# EAGLE board Electronics_Design_v1 v2 (EAGLE 9.7.0)

Size 160 x 134.29 mm. Coordinates in mm from the lower left corner, seen from the top.
Outline: 0,0 160,0 160,134.29 0,134.29 0,0
Copper layers (1*16): Top / Bottom
Stack-up Default Layer Stack: Top User Defined 0.035mm / Dielectric-1 User Defined 1.5mm / Bottom User Defined 0.035mm
Design rules "default": minimum track width 6mil, minimum drill 0.35mm, track to track 6mil, track to pad 6mil, pad to pad 6mil, via to via 6mil, smd to smd 6mil, copper to edge 40mil, drill to drill 6mil, minimum pad ring 10mil, minimum via ring 8mil, stop-mask expansion 4mil, vias tented up to drill 0mil, thermal gap 10mil

## Footprints (pad centres in the part's own frame; a part is rotated, then mirrored left to right if it is on the bottom)
CAPPRD500W60D1000H1250 = drill 0.85 pad 1.2: N 2.5,0 | drill 0.85 pad 1.2 square: P -2.5,0
CAPRD2261W240D5080H5555B = drill 2.6 pad 3.9: 1 -11.305,0; 2 11.305,0
FAIRCHILD_SEMICONDUCTOR_1N4728A_0 = drill 1.15 pad 1.65: 1 -4.5,0; 2 4.5,0
DO35-4 = drill 0.9 pad 1.422: A 5.08,0 | drill 0.9 pad 1.422 square: C -5.08,0
LCD_AOM12864A0-1.54WW-ANO = drill 1 square: 1 -7.62,17 | drill 1: 2 -5.08,17; 3 -2.54,17; 4 0,17; 5 2.54,17; 6 5.08,17; 7 7.62,17 | drill 2.2: P1 -18.7,16.5; P2 18.7,16.5; P3 -18.7,-16.5; P4 18.7,-16.5
CONV_R-78E5.0-1.0 = drill 1 square: 1 -2.54,-2.25 | drill 1: 2 0,-2.25; 3 2.54,-2.25
RESAD724W46L381D178B = drill 0.66 pad 1.26: 1 -3.62,0; 2 3.62,0
3310Y-001-104L-ND = drill 0.71: 1 -2.54,-2.54; 2 0,2.54; 3 2.54,-2.54
SOP65P640X120-14N = smd 1.56 x 0.41: 1 -2.88,1.95; 2 -2.88,1.3; 3 -2.88,0.65; 4 -2.88,0; 5 -2.88,-0.65; 6 -2.88,-1.3; 7 -2.88,-1.95; 8 2.88,-1.95; 9 2.88,-1.3; 10 2.88,-0.65; 11 2.88,0; 12 2.88,0.65; 13 2.88,1.3; 14 2.88,1.95
TI_NATIONAL_SEMICONDUCTOR_LM4040BIZ-5.0_0 = drill 0.75 pad 2 square: 1 0,-1.27 | drill 0.75 pad 2: 2 0,0; 3 0,1.27
CUI_ACZ11BR1E-20FD1-20C = drill 1.2: A -2.5,-7.5; B 2.5,-7.5; C 0,-7.5; S1 -2.5,7; S2 2.5,7 | drill 1.8 square: P1 -4.7,0; P2 4.7,0
N14 = drill 0.787 pad 1.295 square: 1 -7.62,15.24 | drill 0.787 pad 1.295: 2 -7.62,12.7; 3 -7.62,10.16; 4 -7.62,7.62; 5 -7.62,5.08; 6 -7.62,2.54; 7 -7.62,0; 8 0,0; 9 0,2.54; 10 0,5.08; 11 0,7.62; 12 0,10.16; 13 0,12.7; 14 0,15.24
RPI_PICO_TH = drill 1.1 pad 1.6 offset: 3V3 8.89,13.97; 3V3_EN 8.89,16.51; ADC_VREF 8.89,11.43; AGND 8.89,6.35; GND@1 -8.89,19.05; GND@2 -8.89,6.35; GND@3 -8.89,-6.35; GND@4 -8.89,-19.05; GND@5 0,-23.9; GND@6 8.89,-19.05; GND@7 8.89,-6.35; GND@8 8.89,19.05; GP0 -8.89,24.13; GP1 -8.89,21.59; GP2 -8.89,16.51; GP3 -8.89,13.97; GP4 -8.89,11.43; GP5 -8.89,8.89; GP6 -8.89,3.81; GP7 -8.89,1.27; GP8 -8.89,-1.27; GP9 -8.89,-3.81; GP10 -8.89,-8.89; GP11 -8.89,-11.43; GP12 -8.89,-13.97; GP13 -8.89,-16.51; GP14 -8.89,-21.59; GP15 -8.89,-24.13; GP16 8.89,-24.13; GP17 8.89,-21.59; GP18 8.89,-16.51; GP19 8.89,-13.97; GP20 8.89,-11.43; GP21 8.89,-8.89; GP22 8.89,-3.81; GP26_A0 8.89,1.27; GP27_A1 8.89,3.81; GP28_A2 8.89,8.89; RUN 8.89,-1.27; SWCLK -2.54,-23.9; SWDIO 2.54,-23.9; VBUS 8.89,24.13; VSYS 8.89,21.59

## Placement (x,y rotation side)
C1  2.2nF  [CAPPRD500W60D1000H1250]  -207.01,41.91 0 top  (outside the outline)
C3  10uF  [CAPRD2261W240D5080H5555B]  -143.51,63.5 0 top  (outside the outline)
C4  22uF  [CAPRD2261W240D5080H5555B]  -39.37,120.65 0 top  (outside the outline)
C5  2.2nF  [CAPRD2261W240D5080H5555B]  -91.44,120.65 0 top  (outside the outline)
D2  FAIRCHILD_SEMICONDUCTOR_1N4728AFAIRCHILD_SEMICONDUCTOR_1N4728A_0_0  [FAIRCHILD_SEMICONDUCTOR_1N4728A_0]  -125.73,271.78 0 top  (outside the outline)
D3  FAIRCHILD_SEMICONDUCTOR_1N4728AFAIRCHILD_SEMICONDUCTOR_1N4728A_0_0  [FAIRCHILD_SEMICONDUCTOR_1N4728A_0]  -138.43,271.78 0 top  (outside the outline)
D4  FAIRCHILD_SEMICONDUCTOR_1N4728AFAIRCHILD_SEMICONDUCTOR_1N4728A_0_0  [FAIRCHILD_SEMICONDUCTOR_1N4728A_0]  -151.13,271.78 0 top  (outside the outline)
D5  1N914.4  [DO35-4]  -165.1,274.32 0 top  (outside the outline)
DS1  OLED Display  [LCD_AOM12864A0-1.54WW-ANO]  -59.69,228.6 0 top  (outside the outline)
PS1  R-78E5.0-1.0  [CONV_R-78E5.0-1.0]  10.16,12.7 0 top
R1  560k  [RESAD724W46L381D178B]  -72.39,264.16 0 top  (outside the outline)
R2  10k  [3310Y-001-104L-ND]  -133.35,214.63 0 top  (outside the outline)
R3  100  [RESAD724W46L381D178B]  -81.28,264.16 0 top  (outside the outline)
R4  1.8k  [RESAD724W46L381D178B]  -90.17,264.16 0 top  (outside the outline)
R5  5.6k  [RESAD724W46L381D178B]  -99.06,264.16 0 top  (outside the outline)
R6  1.8k  [RESAD724W46L381D178B]  -107.95,264.16 0 top  (outside the outline)
R7  100k  [RESAD724W46L381D178B]  -116.84,264.16 0 top  (outside the outline)
R8  100k  [RESAD724W46L381D178B]  -125.73,264.16 0 top  (outside the outline)
R9  1.1M  [RESAD724W46L381D178B]  -134.62,264.16 0 top  (outside the outline)
R10  10k  [3310Y-001-104L-ND]  -143.51,214.63 0 top  (outside the outline)
R11  100  [RESAD724W46L381D178B]  -143.51,264.16 0 top  (outside the outline)
R12  1.8k  [RESAD724W46L381D178B]  -152.4,264.16 0 top  (outside the outline)
R13  5.6k  [RESAD724W46L381D178B]  -161.29,264.16 0 top  (outside the outline)
R14  1.8k  [RESAD724W46L381D178B]  -170.18,264.16 0 top  (outside the outline)
R15  100k  [RESAD724W46L381D178B]  -179.07,264.16 0 top  (outside the outline)
R16  100k  [RESAD724W46L381D178B]  -187.96,264.16 0 top  (outside the outline)
R17  1.1M  [RESAD724W46L381D178B]  -196.85,264.16 0 top  (outside the outline)
R19  100  [RESAD724W46L381D178B]  -17.78,274.32 0 top  (outside the outline)
R20  1.8k  [RESAD724W46L381D178B]  -26.67,274.32 0 top  (outside the outline)
R21  6.8k  [RESAD724W46L381D178B]  -35.56,274.32 0 top  (outside the outline)
R22  1.8k  [RESAD724W46L381D178B]  -44.45,274.32 0 top  (outside the outline)
R23  100k  [RESAD724W46L381D178B]  -53.34,274.32 0 top  (outside the outline)
R24  100k  [RESAD724W46L381D178B]  -62.23,274.32 0 top  (outside the outline)
R25  150  [RESAD724W46L381D178B]  -71.12,274.32 0 top  (outside the outline)
R26  200  [RESAD724W46L381D178B]  -80.01,274.32 0 top  (outside the outline)
R27  150  [RESAD724W46L381D178B]  -88.9,274.32 0 top  (outside the outline)
R28  200  [RESAD724W46L381D178B]  -97.79,274.32 0 top  (outside the outline)
R29  150  [RESAD724W46L381D178B]  -106.68,274.32 0 top  (outside the outline)
R30  200  [RESAD724W46L381D178B]  -115.57,274.32 0 top  (outside the outline)
R31  10k  [3310Y-001-104L-ND]  -153.67,214.63 0 top  (outside the outline)
U1  TL084  [SOP65P640X120-14N]  -176.53,210.82 0 top  (outside the outline)
U2  TL084  [SOP65P640X120-14N]  -185.42,210.82 0 top  (outside the outline)
U3  TL084  [SOP65P640X120-14N]  -194.31,210.82 0 top  (outside the outline)
U4  TL084  [SOP65P640X120-14N]  -17.78,265.43 0 top  (outside the outline)
U5  TL084  [SOP65P640X120-14N]  -26.67,265.43 0 top  (outside the outline)
U6  TL084  [SOP65P640X120-14N]  -35.56,265.43 0 top  (outside the outline)
U7  TL084  [SOP65P640X120-14N]  -44.45,265.43 0 top  (outside the outline)
U8  TI_NATIONAL_SEMICONDUCTOR_LM4040BIZ-5.0TI_NATIONAL_SEMICONDUCTOR_LM4040BIZ-5.0_0_0  [TI_NATIONAL_SEMICONDUCTOR_LM4040BIZ-5.0_0]  -52.07,264.16 0 top  (outside the outline)
U9  TI_NATIONAL_SEMICONDUCTOR_LM4040BIZ-5.0TI_NATIONAL_SEMICONDUCTOR_LM4040BIZ-5.0_0_0  [TI_NATIONAL_SEMICONDUCTOR_LM4040BIZ-5.0_0]  -58.42,264.16 0 top  (outside the outline)
U10  TI_NATIONAL_SEMICONDUCTOR_LM4040BIZ-5.0TI_NATIONAL_SEMICONDUCTOR_LM4040BIZ-5.0_0_0  [TI_NATIONAL_SEMICONDUCTOR_LM4040BIZ-5.0_0]  -64.77,264.16 0 top  (outside the outline)
U11  Rotary Encoder  [CUI_ACZ11BR1E-20FD1-20C]  -120.65,217.17 0 top  (outside the outline)
U12  TL084CNN14  [N14]  44.45,107.95 0 top
U13  TL084CNN14  [N14]  -191.77,13.97 0 top  (outside the outline)
X1  Piico Pi  [RPI_PICO_TH]  128.27,46.99 270 top
X2  [RPI_PICO_TH]  19.05,106.68 0 top
X3  [RPI_PICO_TH]  57.15,106.68 0 top
X4  [RPI_PICO_TH]  100.33,104.14 0 top

## Library data of the parts
C1 = EEUFC1J101; A_MAX: 12.5; B_MAX: 0.65; B_NOM: 0.6; DESCRIPTION: FC-A; D_NOM: 10; E_NOM: 5; MF: PANASONIC; PARTREV: 20-DEC-19
C3-C5 = Capacitor; CATEGORY: Capacitor
D2-D4 = Fairchild Semiconductor - 1N4728A; COMPONENT_LINK_1_DESCRIPTION: Manufacturer URL; COMPONENT_LINK_1_URL: http://www.fairchildsemi.com/; COMPONENT_LINK_3_DESCRIPTION: Package Specification; COMPONENT_LINK_3_URL: http://www.fairchildsemi.com/dwg/DO/DO41A.pdf; DATASHEET: http://www.fairchildsemi.com/ds/1N/1N4744A.pdf; DATASHEET_VERSION: Rev. H3; FOOTPRINT_VARIANT_NAME_0: Manufacturer Recommended; IMPORTED: yes; IMPORTED_FROM: vault; IMPORT_TS: 1521843604; IR_UA: 100; MF: Fairchild Semiconductor; MOUNTING_TECHNOLOGY: Through Hole; MPN: 1N4728A; OPERATING_AND_STORAGE_TEMPERATURE_RANGE: -65 to 200 degC; PACKAGE: DO-41-2; PACKAGE_DESCRIPTION: 2-Pin Axial leaded, Body 2.72 x 5.2 mm, Lead Spread 25.4 mm; PACKAGE_VERSION: Rev. 2; PD_W: 1; PREFIX: D; RELEASE_DATE: 1396598095; ROHS: Yes; TEST_CURRENT_IZ_MA: 76; TOLERANCE: 5%; VAULT_GUID: BB5BB100-3A3D-49B5-B4BA-51B09125605A; VAULT_REVISION: 7D3D7113-8068-4E65-AD6A-1728C093E95D; VZ_MAX_V: 3.465; VZ_MIN_V: 3.135; ZZ_MAX_OHM: 10
D5 = 1N914
DS1 = AOM12864A0-1.54WW-ANO; MANUFACTURER: Orient Display; MAXIMUM_PACKAGE_HEIGHT: 5.5mm; PARTREV: O; STANDARD: Manufacturer Recommendations
PS1 = R-78E5.0-1.0; MANUFACTURER: RECOM; MAXIMUM_PACKAGE_HEIGHT: 10.40mm; PARTREV: 6; STANDARD: Manufacturer Recommendations
R1 R3 R9 R11 R17 R19 R25 R27 R29 = Resistor; CATEGORY: Resistor; SUB-CATEGORY: Fixed
R2 R10 R31 = Potentiometer_Trimmers; CREATED_BY: PCBLayout.com; DIGIKEY_PARTNO: 3310Y-001-104L-ND; MANUFACTURER: Bourns Inc.; MPN: 3310Y-001-104L
R4-R8 R12-R16 R20-R24 R26 R28 R30 = Tutorial - Fusion 360; CATEGORY: Resistor; SUB-CATEGORY: Fixed
U1-U7 = TL084; A1_MIN: 0.15; A_MAX: 1.2; A_MIN: 1.2; A_NOM: 1.2; B_MAX: 0.3; B_MIN: 0.19; B_NOM: 0.245; D2_MAX: 0.0; D_MAX: 5.1; D_MIN: 4.9; D_NOM: 5.0; E1_MAX: 4.5; E1_MIN: 4.3; E1_NOM: 4.4; E2_MAX: 0.0; ENOM: 0.65; E_MAX: 6.4; E_MIN: 6.4; E_NOM: 6.4; L_MAX: 0.75; L_MIN: 0.5; L_NOM: 0.625; MANUFACTURER: Texas Instruments; MAXIMUM_PACKAGE_HEIGHT: 1.2mm; PIN_COUNT: 14.0; STANDARD: IPC 7351B
U8-U10 = TI National Semiconductor - LM4040BIZ-5.0; CODE__JEDEC: TO-226-AA; COMPONENT_LINK_1_DESCRIPTION: LM4040 Datasheet; COMPONENT_LINK_1_URL: http://www.national.com/ds/LM/LM4040.pdf; COMPONENT_LINK_2_DESCRIPTION: LM4040 Web Page; COMPONENT_LINK_2_URL: http://www.national.com/pf/LM/LM4040.html; COMPONENT_LINK_3_DESCRIPTION: Z03A Package Page; COMPONENT_LINK_3_URL: http://www.national.com/packaging/folders/z03a.html; COMP_TYPE: Voltage Reference IC; DATASHEET_VERSION: Apr-2005; IMPORTED: yes; IMPORTED_FROM: vault; IMPORT_TS: 1521180609; MF: TI National Semiconductor; MPN: LM4040BIZ-5.0; PACKAGE: Z03A; PACKAGE_DESCRIPTION: TO-92, Molded, 3 Lead; PACKAGE_TOP_MARKING: NSXYTT*4040B*IZ5.0; PACKAGE_VERSION: revG, Sep-2000; PIN_COUNT: 3; POWER_WISE: N; PREFIX: U; ROHS: No; VAULT_GUID: CCAAE809-EA0A-4F87-952E-8A300FF63A12; VAULT_REVISION: 709C3BE3-EA26-41DE-880D-F4C7CBE28450
U11 = ACZ11BR1E-20FD1-20C; MANUFACTURER: CUI Devices; MAXIMUM_PACKAGE_HEIGHT: 26.5mm; PARTREV: 1.02; STANDARD: Manufacturer Recommendations
U12 U13 = 2023-02-17_00-49-57_Library; COPYRIGHT: Copyright (C) 2023 Ultra Librarian. All rights reserved.; MANUFACTURER_PART_NUMBER: TL084CN; MFR_NAME: Texas Instruments
X1-X4 = RaspberryPi_Pico

## Nets
+5V: PS1.1 R26.2 U5.4 X1.VBUS
+IN1: U1.3
+IN2: U2.3
+IN3: U5.3
-5V: PS1.2 U1.11 U2.11 U5.11
-IN1: R1.2 R31.1 U1.2
-IN2: R2.1 R9.2 U2.2
-IN3: R10.1 R17.2 U5.2
GND: D2.1 D3.1 D4.1 R3.2 R11.2 R19.2 U1.6 U3.6 U6.6 U8.1 U9.1 U10.1
N$1: R4.2 R5.2 R6.1 U1.5
N$2: R3.1 R31.2 R31.3
N$3: R1.1 R4.1 U1.1
N$4: R5.1
N$5: R6.2 R7.1 U1.7
N$8: C1.P R7.2 R8.1
N$9: R8.2 U1.10
N$10: C1.N
N$11: U1.9
N$12: X2.3V3 X2.3V3_EN
N$15: C3.1 D5.A
N$16: C4.2
N$17: D5.C
N$18: C3.2
N$19: C4.1 PS1.3
N$20: R2.2 R2.3 R11.1
N$21: R10.2 R10.3 R19.1
N$22: R9.1 R12.1 U2.1
N$23: R12.2 R13.2 R14.1 U3.5
N$24: R13.1
N$25: R14.2 R15.1 U3.7
N$28: C5.1 R15.2 R16.1
N$29: R16.2 U4.10
N$30: C5.2
N$31: U4.9
N$32: X3.3V3 X3.3V3_EN
N$35: R17.1 R20.1 U5.1
N$36: R20.2 R21.2 R22.1 U6.5
N$37: R21.1
N$38: R22.2 R23.1 U6.7
N$41: R23.2 R24.1
N$42: R24.2 U7.10
N$44: U7.9
N$45: R29.1 R30.1 U7.8 U10.2
N$48: D2.2 R25.2 X1.GP28_A2
N$49: R25.1 R26.1 U1.8 U8.2
N$50: X1.3V3 X1.3V3_EN
N$51: D3.2 R27.2 X2.GP28_A2
N$52: R27.1 R28.1 U4.8 U9.2
N$53: R28.2 U2.4 X2.VBUS
N$54: D4.2 R29.2 X3.GP28_A2
N$55: X1.GP0 X4.GP1
N$56: R30.2 X3.VBUS
N$57: X1.GP1 X4.GP0
N$58: X1.GND@8 X2.GND@8 X3.GND@8 X4.GND@1
N$59: X2.GP0 X4.GP13
N$60: X2.GP1 X4.GP12
N$61: X3.GP0 X4.GP17
N$62: X3.GP1 X4.GP16
N$63: U11.S1 X4.GND@6
N$64: U11.A U11.S2 X4.GP19
N$65: U11.C X4.GP18
N$66: U11.B X4.GND@4
N$67: DS1.2 X4.3V3_EN
N$68: DS1.1 X4.GND@7
N$69: DS1.4 X4.GP20
N$70: DS1.3 X4.GP21
N$71: X4.GND@8
VCC+: U1.4 U3.4 U4.4 U6.4 U7.4 U12.4 U13.4
VCC-: U3.11 U4.11 U6.11 U7.11 U12.11 U13.11

## Tracks (layer width: path | path; a pad name or v marks a point on that pad's centre or on a via)
+5V  (3 unrouted)
-5V  (3 unrouted)
-IN1  (2 unrouted)
-IN2  (2 unrouted)
-IN3  (2 unrouted)
GND  (11 unrouted)
N$1  (3 unrouted)
N$2  (2 unrouted)
N$3  (2 unrouted)
N$5  (2 unrouted)
N$8  (2 unrouted)
N$9  (1 unrouted)
N$12  (1 unrouted)
N$15  (1 unrouted)
N$19  (1 unrouted)
N$20  (2 unrouted)
N$21  (2 unrouted)
N$22  (2 unrouted)
N$23  (3 unrouted)
N$25  (2 unrouted)
N$28  (2 unrouted)
N$29  (1 unrouted)
N$32  (1 unrouted)
N$35  (2 unrouted)
N$36  (3 unrouted)
N$38  (2 unrouted)
N$41  (1 unrouted)
N$42  (1 unrouted)
N$45  (3 unrouted)
N$48  (2 unrouted)
N$49  (3 unrouted)
N$50  (1 unrouted)
N$51  (2 unrouted)
N$52  (3 unrouted)
N$53  (2 unrouted)
N$54  (2 unrouted)
N$55  (1 unrouted)
N$56  (1 unrouted)
N$57  (1 unrouted)
N$58  (3 unrouted)
N$59  (1 unrouted)
N$60  (1 unrouted)
N$61  (1 unrouted)
N$62  (1 unrouted)
N$63  (1 unrouted)
N$64  (2 unrouted)
N$65  (1 unrouted)
N$66  (1 unrouted)
N$67  (1 unrouted)
N$68  (1 unrouted)
N$69  (1 unrouted)
N$70  (1 unrouted)
VCC+  (6 unrouted)
VCC-  (5 unrouted)